# Altium PCB G38TPS40200CC.PcbDoc
Units mil, origin at the board's own origin, x right, y up, seen from the top; angles counter-clockwise.
Board outline 5970.62 x 4317.08 mil, 2 copper layers (Top Layer, Bottom Layer); 99 components, 51 nets, 225 pads, 8 vias.
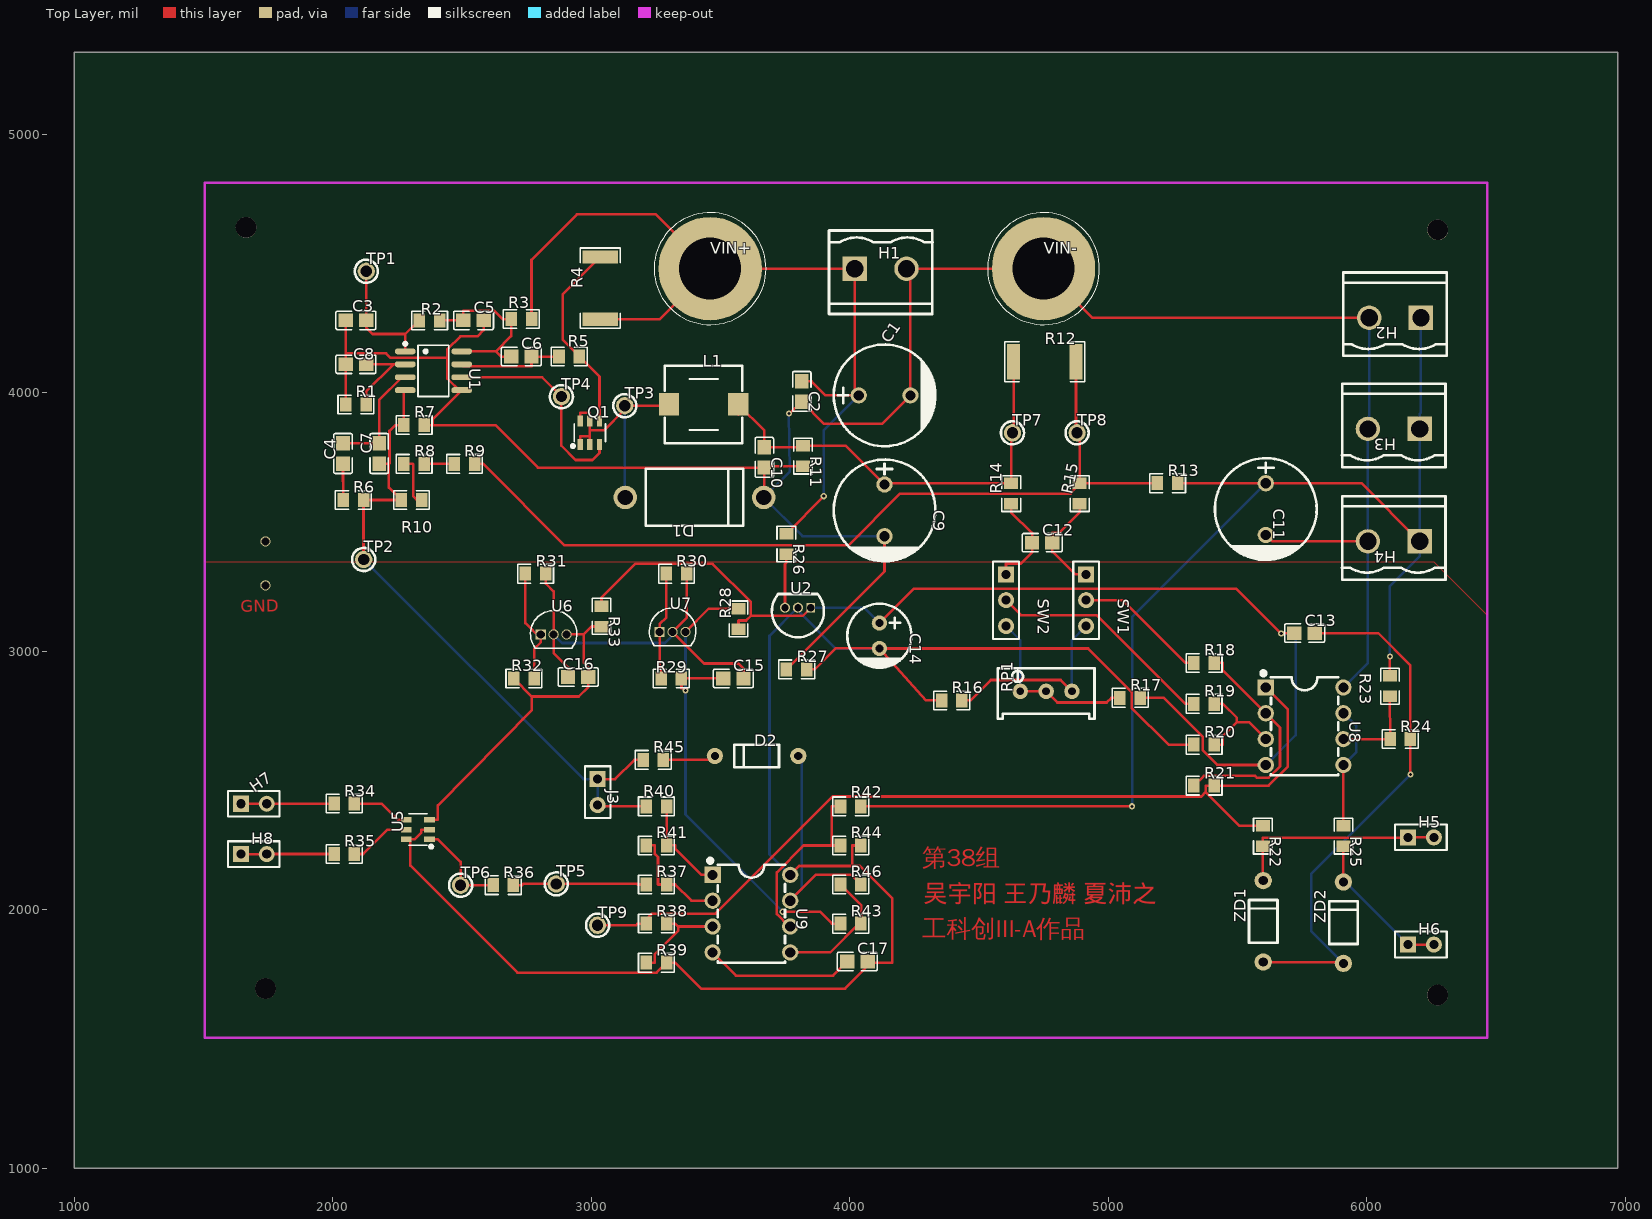
[diagram p0: Top Layer view]
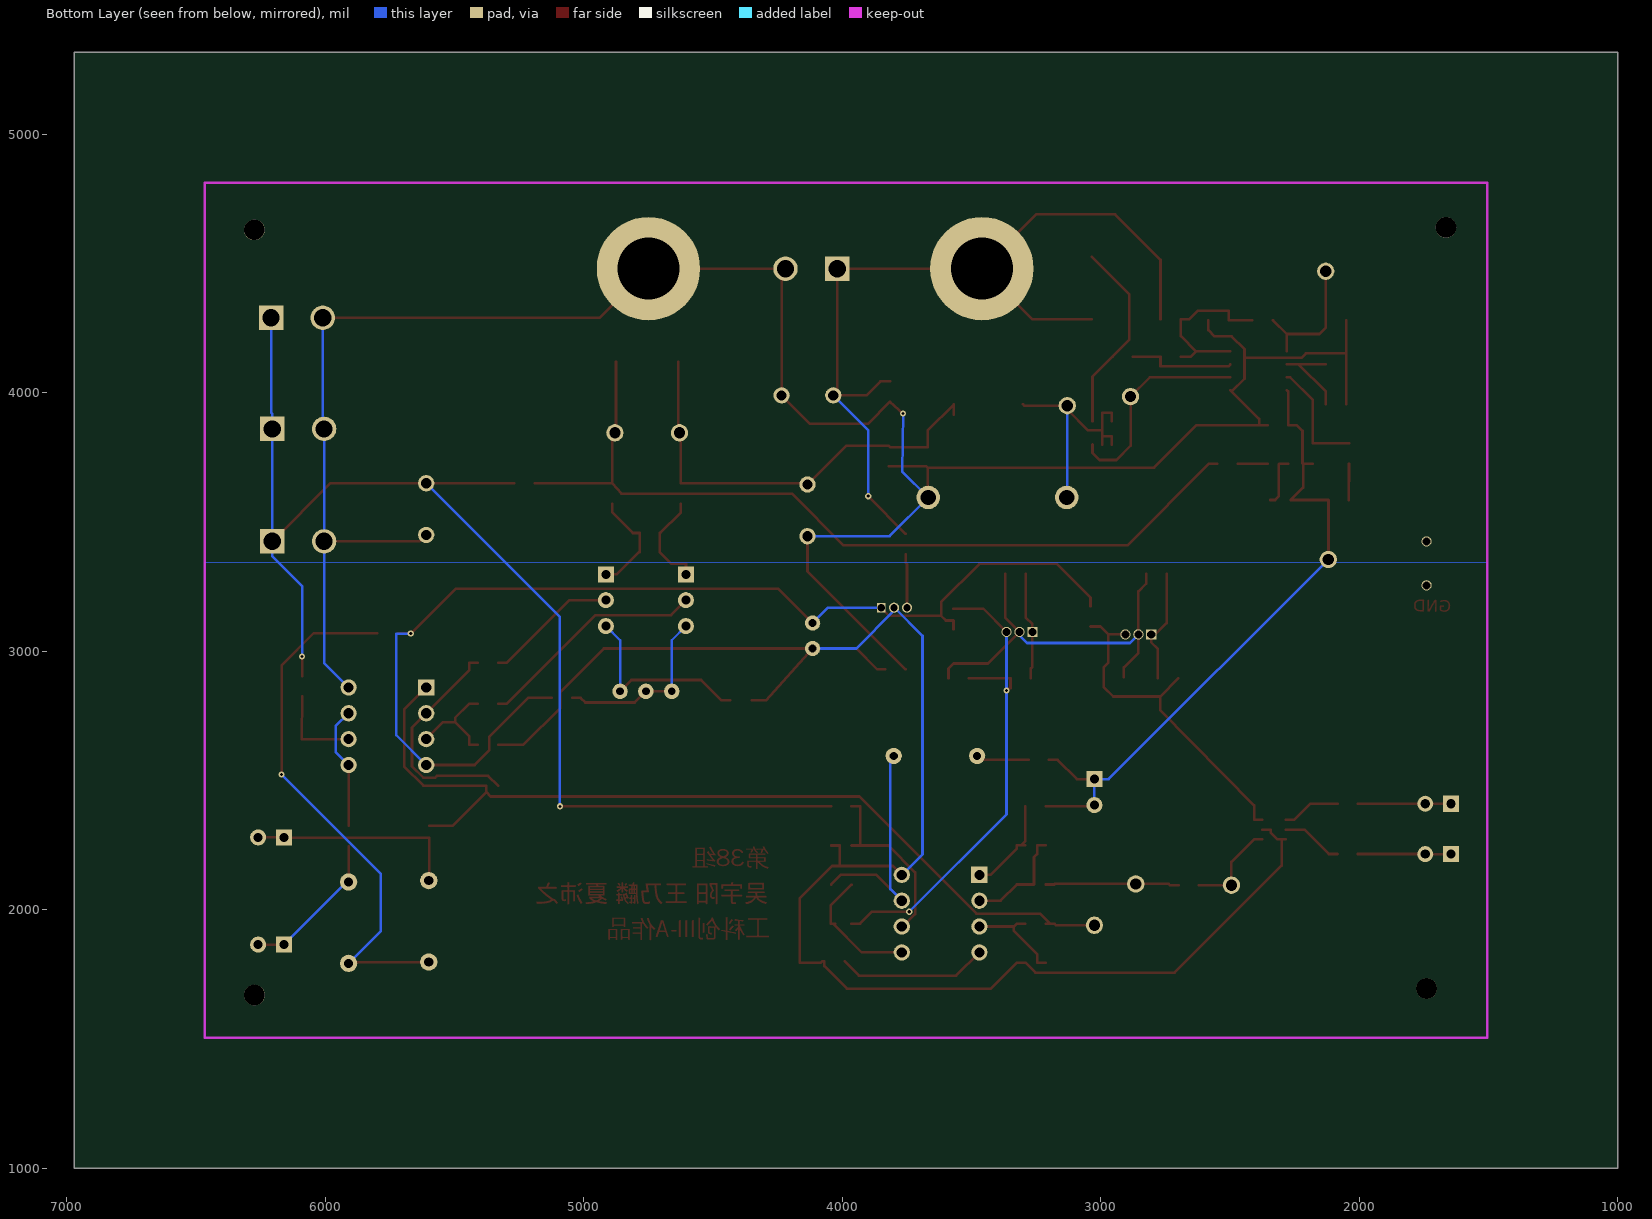
[diagram p1: Bottom Layer view, seen from below]

## Layer stack, top to bottom
Top Layer: signal copper (thickness not stored)
Dielectric: dielectric 12.6, FR-4, Dk 4.8
Bottom Layer: signal copper (thickness not stored)

## Board outline
6970.62,1000 1000,1000 1000,5317.08 6970.62,5317.08

## Components (designator, comment, footprint, x,y, rotation, side; value= is the part's Value field where it differs from the comment)
C1 "470u/35V" 470UF/50V 4134.41,3990.08 r0 top
C2 "0.1u" C0805 3814.41,4005.08 r270 top
C3 "470p" C0805 2089.41,4280.08 r180 top
C4 "1500p" C0805 2039.41,3765.08 r270 top
C5 "0.1u" C0805 2544.41,4280.08 r0 top
C6 "200p" C0805 2729.41,4140.08 r0 top
C7 "1u" C0805 2179.41,3765.08 r90 top
C8 "3.3u" C0805 2089.41,4110.08 r0 top
C9 "470u/35V" 470UF/50V 4134.41,3545.08 r270 top
C10 "0.1u" C0805 3669.41,3750.08 r270 top
C11 "470u/35V" 470UF/50V 5609.41,3550.08 r270 top
C12 "0.1u" C0805 4744.41,3420.08 r0 top
C13 "0.1u" C0805 5759.41,3070.08 r0 top
C14 "33u" 33UF/50V 4114.41,3060.08 r270 top
C15 "0.1u" C0805 3549.41,2895.08 r0 top
C16 "0.1u" C0805 2949.41,2900.08 r180 top
C17 "0.1u" C0805 4029.41,1800.08 r0 top
D1 "1N5822_C845404" DO-27_BD5.3-L8.4-P12.40-D1.3-RD 3399.41,3595.08 r180 top
D2 "1N4148" DO-35_BD2.0-L4.2-P8.20-D0.5-RD 3639.41,2595.08 r0 top
H1 "HDR-F-2.54_1x2" CONN-TH_P5.08_2EDGV-5.08-02P-14-100A-H 4119.41,4480.08 r0 top
H2 "HDR-F-2.54_1x2" CONN-TH_P5.08_2EDGV-5.08-02P-14-100A-H 6109.41,4290.08 r180 top
H3 "HDR-F-2.54_1x2" CONN-TH_P5.08_2EDGV-5.08-02P-14-100A-H 6104.41,3860.08 r180 top
H4 "HDR-F-2.54_1x2" CONN-TH_P5.08_2EDGV-5.08-02P-14-100A-H 6104.41,3425.08 r180 top
H5 "HDR-F-2.54_1x2" HDR-F-2.54_1X2 6209.41,2280.08 r0 top
H6 "HDR-F-2.54_1x2" HDR-F-2.54_1X2 6209.41,1865.08 r0 top
H7 "HDR-F-2.54_1x2" HDR-F-2.54_1X2 1694.41,2410.08 r0 top
H8 "HDR-F-2.54_1x2" HDR-F-2.54_1X2 1694.41,2215.08 r0 top
J3 "HDR-F-2.54_1x2" HDR-F-2.54_1X2 3024.41,2455.08 r270 top
L1 "33uH" IND-SMD_L7.0-W7.0_SMDRI74-330MT 3434.41,3955.08 r0 top
Q1 "TPFDC654P" SOT-23-6_L2.9-W1.6-P0.95-LS2.8-BL 2994.41,3845.08 r0 top
R1 "1M" R0805 2089.41,3955.08 r0 top
R2 "68k" R0805 2374.41,4280.08 r180 top
R3 "10" R0805 2729.41,4285.08 r180 top
R4 "0.05" R2512 3034.41,4405.08 r90 top
R5 "2k" R0805 2914.41,4140.08 r180 top
R6 "300k" R0805 2079.41,3585.08 r0 top
R7 "16k" R0805 2314.41,3875.08 r0 top
R8 "100k" R0805 2314.41,3725.08 r0 top
R9 "51" R0805 2509.41,3725.08 r0 top
R10 "100" R0805 2304.41,3585.08 r0 top
R11 "2k" R0805 3819.41,3755.08 r270 top
R12 "0.10/0.5W" R2512 4754.41,4120.08 r0 top
R13 "0" R0805 5229.41,3650.08 r0 top
R14 "10" R0805 4624.41,3610.08 r270 top
R15 "10" R0805 4889.41,3610.08 r90 top
R16 "5.1k" R0805 4394.41,2810.08 r0 top
R17 "5.1K" R0805 5084.41,2820.08 r0 top
R18 "10k" R0805 5370.66,2955.08 r0 top
R19 "10k" R0805 5370.66,2796.75 r0 top
R20 "100k" R0805 5370.66,2638.41 r0 top
R21 "100k" R0805 5370.66,2480.08 r0 top
R22 "10" R0805 5597.84,2285.08 r270 top
R23 "1k" R0805 6089.41,2865.08 r270 top
R24 "1k" R0805 6129.41,2660.08 r0 top
R25 "10" R0805 5909.41,2285.08 r270 top
R26 "0" R0805 3754.41,3415.08 r270 top
R27 "0" R0805 3794.41,2930.08 r0 top
R28 "510" R0805 3569.41,3125.08 r90 top
R29 "2.2k" R0805 3309.41,2895.08 r180 top
R30 "6.8k" R0805 3329.41,3300.08 r0 top
R31 "1k" R0805 2784.41,3300.08 r0 top
R32 "1k" R0805 2739.41,2895.08 r0 top
R33 "1k" R0805 3039.41,3135.08 r270 top
R34 "10" R0805 2044.41,2410.58 r0 top
R35 "10" R0805 2044.41,2215.58 r0 top
R36 "0" R0805 2659.41,2095.08 r0 top
R37 "10k" R0805 3251.91,2097.58 r0 top
R38 "10k" R0805 3251.91,1946.33 r0 top
R39 "100k" R0805 3251.91,1795.08 r0 top
R40 "51k" R0805 3251.91,2400.08 r180 top
R41 "100k" R0805 3251.91,2248.83 r0 top
R42 "10k" R0805 4003.39,2400.08 r180 top
R43 "10k" R0805 4003.39,1945.93 r0 top
R44 "100k" R0805 4003.39,2248.7 r0 top
R45 "100k" R0805 3239.41,2580.08 r0 top
R46 "100k" R0805 4003.39,2097.32 r0 top
RP1 "1k" RES-ADJ-TH_3P-L9.7-W5.0-P2.54 4759.41,2845.08 r90 top
SW1 "CS12ANW03" HDR-M-2.54_1X3 4914.41,3197.58 r270 top
SW2 "CS12ANW03" HDR-M-2.54_1X3 4604.41,3197.58 r270 top
TP1 "1625854-2" TESTPOINT-TH_Z2-1.5-8-2.5 2129.41,4470.08 r0 top
TP2 "1625854-2" TESTPOINT-TH_Z2-1.5-8-2.5 2119.41,3355.08 r0 top
TP3 "1625854-2" TESTPOINT-TH_Z2-1.5-8-2.5 3129.41,3950.08 r0 top
TP4 "1625854-2" TESTPOINT-TH_Z2-1.5-8-2.5 2884.41,3985.08 r0 top
TP5 "1625854-2" TESTPOINT-TH_Z2-1.5-8-2.5 2864.41,2100.08 r0 top
TP6 "1625854-2" TESTPOINT-TH_Z2-1.5-8-2.5 2494.41,2095.08 r0 top
TP7 "1625854-2" TESTPOINT-TH_Z2-1.5-8-2.5 4629.41,3845.08 r0 top
TP8 "1625854-2" TESTPOINT-TH_Z2-1.5-8-2.5 4879.41,3845.08 r0 top
TP9 "1625854-2" TESTPOINT-TH_Z2-1.5-8-2.5 3024.41,1940.08 r0 top
U1 "TPS40200D" SOIC-8_L4.9-W3.9-P1.27-LS6.0-BL 2389.41,4085.08 r270 top
U2 "78L07" TO-92 3799.41,3155.08 r180 top
U5 "DAC6571IDBVT" SOT-23-6_L2.9-W1.6-P0.95-LS2.8-BL 2329.41,2310.08 r90 top
U6 "TL431L-1%" TO-92-3_L4.6-W3.6-P1.27-L 2854.41,3065.08 r0 top
U7 "TL431L-1%" TO-92-3_L4.6-W3.6-P1.27-L 3314.41,3075.08 r0 top
U8 "TLV2372IP" PDIP-8_L9.6-W6.4-P2.54-LS7.9-BL 5759.41,2710.08 r270 top
U9 "TLV2372IP" PDIP-8_L9.6-W6.4-P2.54-LS7.9-BL 3619.41,1985.08 r270 top
VIN+ "5012" BANANA_JACK_1PIN 3459.41,4480.08 r0 top
VIN- "5012" BANANA_JACK_1PIN 4749.41,4480.08 r0 top
ZD1 "3.3V" DO-41_BD2.8-L4.2-P8.00-D0.7-FD 5599.41,1955.08 r90 top
ZD2 "3.3V" DO-41_BD2.8-L4.2-P8.00-D0.7-FD 5909.41,1950.08 r90 top

## Footprints (in the part's own frame and the unit in brackets; to place one, negate y for a bottom-side part, rotate by r counter-clockwise, add the part's x,y. Pads: shape width x height; smd on the part's side, far side on the other; paste and mask are expansions set on the pad)
33UF/50V [mm]
  round 1.5 hole 0.8: 1(-1.25,0) 2(1.25,0)
  silkscreen extent -3.15,-3.15 3.17,3.15
470UF/50V [mm]
  round 1.6 hole 1: +(-2.54,0) -(2.54,0)
  silkscreen extent -4.99,-5 5.08,5
BANANA_JACK_1PIN [mil]
  round 400 hole 240.16: 1(0,0)
  silkscreen extent -216,-216 217,217
C0805 [mm]
  rect 1.41x1.35 smd: 1(-1,0) 2(1,0)
  silkscreen extent -1.96,-0.9 1.96,0.9
CONN-TH_P5.08_2EDGV-5.08-02P-14-100A-H [mm]
  rect 2.4x2.4 hole 1.7: 1(-2.54,0)
  round 2.4 hole 1.7: 2(2.54,0)
  silkscreen extent -5.08,-4.45 5.1,3.75
DO-27_BD5.3-L8.4-P12.40-D1.3-RD [mm]
  round 2.3 hole 1.5: 1(6.8,0) 2(-6.8,0)
  silkscreen extent -4.8,-2.8 4.8,2.8
DO-35_BD2.0-L4.2-P8.20-D0.5-RD [mm]
  round 1.6 hole 0.8: 1(-4.1,0) 2(4.1,0)
  silkscreen extent -2.2,-1.1 2.2,1.1
DO-41_BD2.8-L4.2-P8.00-D0.7-FD [mm]
  round 1.7 hole 0.9: 1(-4,0) 2(4,0)
  silkscreen extent -2.1,-1.4 2.1,1.4
HDR-F-2.54_1X2 [mil]
  rect 62x62 hole 35: 1(-50,0)
  round 62 hole 35: 2(50,0)
  silkscreen extent -100,-49 100,50
HDR-M-2.54_1X3 [mil]
  rect 62x62 hole 35: 1(-100,0)
  round 62 hole 35: 2(0,0) 3(100,0)
  silkscreen extent -150,-50 150,50
IND-SMD_L7.0-W7.0_SMDRI74-330MT [mm]
  rect 2x2.2 smd: 1(-3.4,0) 2(3.4,0)
  silkscreen extent -3.8,-3.8 3.8,3.8
PDIP-8_L9.6-W6.4-P2.54-LS7.9-BL [mil]
  rect 63x63 hole 39.37: 1(-150,-150)
  round 63 hole 39.37: 2(-50,-150) 3(50,-150) 4(150,-150) 5(150,150) 6(50,150) 7(-50,150) 8(-150,150)
  silkscreen extent -213,-167 190,130
R0805 [mil]
  rect 44.59x54.21 smd: 1(-39.37,0) 2(39.37,0)
  silkscreen extent -69,-36 69,36
R2512 [mil]
  rect 50.49x136.06 smd: 1(-120.72,0) 2(120.72,0)
  silkscreen extent -155,-77 155,77
RES-ADJ-TH_3P-L9.7-W5.0-P2.54 [mil]
  round 60 hole 30: 1(0,100) 2(0,0) 3(0,-100)
  silkscreen extent -106,-187 89,187
SOIC-8_L4.9-W3.9-P1.27-LS6.0-BL [mm]
  oval 0.588x2.045 smd: 1(-1.905,-2.773) 2(-0.635,-2.773) 3(0.635,-2.773) 4(1.905,-2.773) 5(1.905,2.773) 6(0.635,2.773) 7(-0.635,2.773) 8(-1.905,2.773)
  silkscreen extent -2.8,-2.92 2.53,1.52
SOT-23-6_L2.9-W1.6-P0.95-LS2.8-BL [mm]
  rect 0.532x1.072 smd: 1(-0.95,-1.149) 2(0,-1.149) 3(0.95,-1.149) 4(0.95,1.149) 5(0,1.149) 6(-0.95,1.149)
  silkscreen extent -1.82,-1.45 1.54,0.89
TESTPOINT-TH_Z2-1.5-8-2.5 [mm]
  round 1.7 hole 1.1: 1(0,0)
  silkscreen extent -1.13,-1.13 1.14,1.13
TO-92 [mil]
  rect 32x38 hole 28: 1(-49.8,-13.36)
  round 39 hole 28: 2(0.2,-13.36) 3(50.2,-13.36)
  silkscreen extent -101,-66 101,101
TO-92-3_L4.6-W3.6-P1.27-L [mm]
  rect 1x1 hole 0.8: 1(-1.27,0)
  round 1 hole 0.8: 2(0,0) 3(1.27,0)
  silkscreen extent -2.28,-1.35 2.28,2.34

## Free pads (board coordinates)
  round 39.37 hole 31.5: 5(1739.41,3425.08) 6(1739.41,3255.08)
  round 80 hole 80 unplated: ""(1664.41,4640.08) ""(1739.41,1695.08) ""(6274.41,1670.08) ""(6274.41,4630.08)

## Via types
v1: diameter 24, hole 12, Top Layer to Bottom Layer, tented both sides, 8 vias

## Nets (pads, with @x,y where several pads share a name; then routed paths per layer and width w, separated by ;. In a path a pad name is that pad's centre, name@x,y a point inside that pad or via, vN(x,y) a via of type N, cw(c..) or ccw(c..) an arc to the next point about the centre after c; other vN are vias at no path point)
+3.3VREF: C16.1 R32.1 R33.2 U5.3 U6.3 | length 1349.5
  Top Layer w10: U5.3@2374.65,2347.48 2406.76,2347.48 ; 2406.71,2347.48 2406.71,2403.78 2769.81,2773.18 2769.41,2825.08 ; R32.1 2769.41,2825.08 ; U6.3 2970.66,3065.08 ; R33.2 3001.29,3095.71 2970.66,3065.08 ; 2769.41,2825.08 2951.41,2825.08 2988.81,2862.48 C16.1 2988.78,2937.67 2970.66,2955.79 2970.66,3065.08
+5VREF: C15.1 R28.2 R29.1 R43.1 U7.3 | length 1941.8
  Top Layer w10: v1(3364.41,2848.21) 3355.66,2856.96 3348.78,2856.96 R29.1 C15.1 ; U7.3 3453.78,3164.45 R28.2@3569.41,3164.45 ; v1(3740.59,1992.41) 3884.23,1992.41 3930.71,1945.93 R43.1
  Bottom Layer w10: U7.3 v1(3364.41,2848.21) 3364.41,2368.59 v1(3740.59,1992.41)
+7V: C13.1 C14.1 R17.2 R28.1 R33.1 U2.1 U8.4 | length 4371.8
  Top Layer w10: R33.1@3039.41,3174.45 3039.41,3207.76 3169.9,3338.25 3469.58,3338.25 3617.09,3190.74 3617.09,3137.42 ; R28.1 3569.41,3119.01 3598.68,3119.01 3617.09,3137.42 ; U2.1 3818.19,3137.42 3617.09,3137.42 ; C14.1 4247.77,3242.65 5494.55,3242.65 v1(5668.97,3068.23) 5679.42,3068.23 5681.27,3070.08 C13.1 ; R17.2 5214.65,2820.08 5364.64,2670.09 5364.64,2617.7 5422.26,2560.08 U8.4
  Bottom Layer w10: U2.1 4055.26,3168.44 C14.1 ; U8.4 5724.41,2675.08 5724.41,3068.18 v1(5668.97,3068.23)
C17_1: C17.1 U9.4 | length 580.7
  Top Layer w10: U9.4 3559.41,1745.08 3935.04,1745.08 C17.1
GND: C1.- C2.2 C3.2 C5.2 C8.1 C9.- C10.2 C11.- D1.2 H1.2 H2.2 H3.2 H4.2 pad.5 R1.1 R7.2 R11.2 R27.1 U1.5 U8.8 VIN-.1 | length 9330.6
  Top Layer w10: R1.1 C8.1 2050.04,4152.67 ; C3.2 2050.04,4152.67 ; R7.2 2387.09,3875.08 ; U1.5 U1.5@2493.22,4004.74 ; C5.2 2583.78,4242.5 2559.54,4218.26 2493.14,4218.26 2443.73,4168.85 2443.73,4135.09 ; D1.2 3669.41,3597.36 C10.2 ; R27.1 4134.41,3309.45 C9.- ; v1(3764.41,3920.08) C2.2@3814.41,3965.08 ; C2.2 3900.01,3880.08 4124.41,3880.08 C1.- 4234.41,4465.08 H1.2 VIN-.1 4939.41,4290.08 H2.2 ; R11.2 3674.41,3715.71 C10.2 ; C11.- 5634.41,3425.08 H4.2 ; 2050.04,4152.67 2054.99,4152.67 2055.04,4152.72 2205.85,4152.72 2223.48,4135.09 2443.73,4135.09 ; 2387.09,3875.08 2629.12,3875.08 2793.49,3710.71 C10.2 ; 2387.09,3875.08 2387.09,3898.61 U1.5@2493.22,4004.74 ; 2443.73,4135.09 2443.73,4054.23 U1.5@2493.22,4004.74
  Bottom Layer w10: v1(3764.41,3920.08) 3768.03,3695.98 D1.2 3817.13,3445.08 C9.- ; U8.8 6004.41,2955.08 H4.2 H3.2 6009.41,3865.08 H2.2
GND1: C13.2 C14.2 C15.2 C16.2 C17.2 pad.6 R16.1 R20.1 R24.2 R27.2 R30.2 R31.2 R39.2 R44.2 U2.2 U5.2 U5.6 U6.2 U7.2 U9.8 ZD1.1 ZD2.1 | length 10381.2
  Top Layer w10: U5.6 U5.6@2300.23,2272.68 ; U5.2@2374.65,2310.08 2342.54,2310.08 2342.54,2298.94 2316.28,2272.68 U5.6@2300.23,2272.68 ; R31.2 2823.78,3261.96 2854.41,3231.33 U6.2 2854.41,2993.3 2910.04,2937.67 C16.2 ; R30.2 3368.78,3129.45 U7.2 3436.87,2952.62 3568.83,2952.62 3588.78,2932.67 C15.2 ; U9.8 3803.68,2169.35 4009.46,2169.35 4009.46,2248.7 R44.2 ; R27.2 3864.41,2930.08 3945.21,3010.88 C14.2 ; 4009.41,2169.38 4038.81,2169.38 4164.41,2043.78 4164.41,1795.08 C17.2@4082.51,1795.08 ; C17.2@4082.55,1795.08 4077.55,1800.08 C17.2 4068.78,1782.5 4043.78,1757.5 3981.41,1695.08 3424.61,1695.08 3324.61,1795.08 R39.2 3253.11,1756.91 2714.42,1756.91 2300.23,2171.1 U5.6@2300.23,2272.68 ; R16.1@4349.41,2810.08 4294.41,2810.08 C14.2 4922.06,3010.87 5090.43,2842.5 5090.43,2781.17 5233.19,2638.41 R20.1 ; ZD1.1 5904.41,1797.6 ZD2.1 ; C13.2 6044.41,3070.08 6168.78,2945.71 R24.2 v1(6168.78,2523.19)
  Bottom Layer w10: U6.2 2887.36,3032.13 3284.69,3032.13 3314.41,3061.85 U7.2 ; U9.8@3768.81,2135.08 3689.41,2214.48 3689.41,3059.28 U2.2@3798.61,3168.48 ; U2.2 3799.21,3156.95 3945.29,3010.87 C14.2 ; ZD2.1 5784.41,1917.6 5784.41,2138.82 v1(6168.78,2523.19)
H7_1: H7.1 H7.2 R34.1 | length 360.8
  Top Layer w10: H7.1 H7.2 1971.23,2410.08 1971.73,2410.58 R34.1
H8_1: H8.1 H8.2 R35.1 | length 360.8
  Top Layer w10: H8.1 1686.42,2215.08 H8.2 1744.91,2215.58 R35.1
ISEN: R21.2 R22.1 R38.1 TP9.1 U8.1 | length 3571.7
  Top Layer w10: TP9.1 3172.98,1940.08 3179.23,1946.33 R38.1@3195.89,1946.33 ; R38.1 R38.1@3195.89,1946.33 ; R21.2 5619.81,2480.08 5694.41,2554.68 5694.41,2775.08 U8.1 ; R21.2 5393.38,2480.08 5376.73,2480.08 5376.73,2455.11 ; R22.1@5597.84,2324.45 5507.39,2324.45 5376.73,2455.11 ; R38.1@3195.89,1946.33 3234.64,1985.08 3480.34,1985.08 3933.51,2438.25 5359.87,2438.25 5376.73,2455.11
L1_2: C9.+ C10.1 L1.2 R11.1 R12.1 R14.1 TP7.1 | length 1742.1
  Top Layer w10: L1.2@3568.27,3915.76 L1.2 3669.41,3853.94 3669.41,3789.45 3814.41,3789.45 3819.41,3794.45 3985.04,3794.45 C9.+ 4138.78,3649.45 4624.41,3649.45 4624.41,3840.08 TP7.1 4633.69,3849.36 R12.1
Q1_4: Q1.4 R4.2 R5.1 | length 761.7
  Top Layer w10: R5.1@2959.14,4135.08 2954.14,4140.08 R5.1 ; Q1.4 3031.81,4062.08 R5.1 ; R4.2 2889.41,4380.78 2889.41,4205.28 R5.1
Q1_6: D1.1 L1.1 Q1.1 Q1.2 Q1.5 Q1.6 TP3.1 | length 974.2
  Top Layer w10: Q1.1 2957.01,3831.95 2994.41,3831.95 ; Q1.6 2957.01,3922.43 2994.41,3922.43 2994.41,3906.38 Q1.5 2994.41,3854.23 ; Q1.2 2994.41,3831.95 ; L1.1@3300.55,3955.08 3295.55,3950.08 TP3.1 3129.41,3935.13 3048.51,3854.23 2994.41,3854.23 ; 2994.41,3831.95 2994.41,3854.23
  Bottom Layer w10: TP3.1 3129.41,3597.36 D1.1
R2_1: C5.1 C6.1 R2.1 R3.2 U1.8 | length 676.5
  Top Layer w10: R2.1 2466.27,4280.08 C5.1 2505.04,4317.67 2505.09,4317.72 2624.09,4317.72 2656.73,4285.08 R3.2 2690.04,4218.85 2631.27,4160.08 ; U1.8 2631.27,4160.08 ; C6.1 2651.27,4140.08 2631.27,4160.08
R2_2: C3.1 R2.2 TP1.1 U1.1 | length 523.7
  Top Layer w10: TP1.1 2128.78,4469.45 C3.1 2128.78,4252.5 2133.78,4247.5 2153.81,4227.47 2280.26,4227.47 ; U1.1 2280.26,4227.47 ; R2.2 2332.87,4280.08 2280.26,4227.47
R6_1: C4.2 R6.1 | length 140.6
  Top Layer w10: C4.2 R6.1
R9_1: R8.2 R9.1 | length 116.3
  Top Layer w10: R8.2 R9.1
R10_1: C7.1 J3.1 J3.2 R6.2 R7.1 R10.1 R40.2 R45.1 TP2.1 U1.4 | length 2658.7
  Top Layer w10: TP2.1 2118.78,3355.71 R6.2 R10.1 2217,3633.12 2217,3725.71 ; C7.1 2217,3725.71 ; U1.4 2275.04,4004.86 R7.1 2241.73,3875.08 2219.34,3852.69 2219.34,3728.05 2217,3725.71 ; J3.2 3029.41,2400.08 R40.2 ; J3.1 3091.73,2505.08 3166.73,2580.08 R45.1
  Bottom Layer w10: TP2.1 2969.41,2505.08 J3.1 J3.2
R10_2: R8.1 R10.2 | length 198.7
  Top Layer w10: R8.1 2308.34,3725.08 2310.48,3722.94 2310.48,3600.08 2325.48,3585.08 R10.2
R14_2: C12.1 R14.2 SW2.1 | length 382.5
  Top Layer w10: SW2.1 4604.41,3339.59 4662.13,3339.59 4705.04,3382.5 C12.1 4705.04,3457.67 4704.14,3457.67 4624.41,3537.4 R14.2
R15_1: C12.2 R15.1 SW1.1 | length 412.9
  Top Layer w10: R15.1 4889.41,3537.4 4809.68,3457.67 4783.78,3457.67 C12.2 4783.78,3382.5 4787.48,3382.5 4872.4,3297.58 SW1.1
R16_2: R16.2 RP1.3 SW1.3 | length 751.8
  Top Layer w10: R16.2 4467.09,2810.08 4545.98,2888.97 4815.52,2888.97 RP1.3
  Bottom Layer w10: RP1.3 4859.41,3042.58 SW1.3
R17_1: R17.1 RP1.1 RP1.2 SW2.3 | length 686.5
  Top Layer w10: RP1.1 RP1.2 4802.81,2801.69 4993.34,2801.69 5011.73,2820.08 R17.1
  Bottom Layer w10: SW2.3 4659.41,3042.58 RP1.1
R18_2: R18.2 R21.1 U8.2 | length 895.5
  Top Layer w10: R21.1 5369.41,2518.28 5567.51,2518.28 5575.01,2510.68 5620.21,2510.68 5664.41,2554.88 5664.41,2705.08 U8.2 5443.34,2926.15 5443.34,2955.08 R18.2
R19_2: R19.2 R20.2 U8.3 | length 408.9
  Top Layer w10: R20.2 5443.34,2638.41 5443.34,2671.72 5497.24,2725.62 ; R19.2@5410.03,2796.75 5443.34,2796.75 5497.24,2742.85 5497.24,2725.62 ; U8.3 5543.87,2725.62 5497.24,2725.62
R22_2: H5.1 H5.2 R22.2 ZD1.2 | length 829.1
  Top Layer w10: 5597.84,2279.01 R22.2 5597.84,2114.13 ZD1.2 ; 5597.89,2279.08 6158.41,2279.08 H5.1 H5.2
R23_2: R23.2 R24.1 U8.6 | length 346.2
  Top Layer w10: U8.6 R24.1 ; R23.2 R24.1
R25_1: R25.1 U8.5 U8.7 | length 477.1
  Top Layer w10: R25.1@5909.41,2324.45 U8.5
  Bottom Layer w10: U8.5 5959.41,2610.08 5959.41,2710.08 U8.7
R25_2: H6.1 H6.2 R25.2 ZD2.2 | length 634.9
  Top Layer w10: ZD2.2 R25.2 ; H6.1@6149.41,1860.08 6154.41,1865.08 H6.2
  Bottom Layer w10: ZD2.2 5916.93,2107.56 H6.1 ; H6.1 6159.41,1862.09 6149.41,1852.09 6149.41,1855.08 H6.1
R26_2: R26.2 U2.3 | length 209.4
  Top Layer w10: U2.3 3749.21,3337.2 3754.41,3342.4 R26.2
R29_2: R29.2 R30.1 U7.1 | length 417.9
  Top Layer w10: R29.2 3270.04,2933.2 3264.41,2938.83 U7.1 3264.41,3105.77 3290.04,3131.4 R30.1
R32_2: R31.1 R32.2 U6.1 | length 455.6
  Top Layer w10: R31.1 2745.04,3109.1 U6.1@2804.41,3049.73 ; R32.2 2778.78,3008.75 2804.41,3034.38 U6.1@2804.41,3049.73 ; U6.1 U6.1@2804.41,3049.73
R34_2: R34.2 U5.4 | length 226.5
  Top Layer w10: R34.2 2188.96,2410.58 2252.06,2347.48 U5.4
R35_2: R35.2 U5.5 | length 239.5
  Top Layer w10: R35.2 2117.09,2215.58 2211.59,2310.08 U5.5
R36_1: R36.1 TP6.1 U5.1 | length 371.6
  Top Layer w10: U5.1@2374.65,2272.68 2406.76,2272.68 2494.41,2185.03 TP6.1 2586.73,2095.08 R36.1
R37_1: R36.2 R37.1 TP5.1 | length 516.9
  Top Layer w10: R36.2 2732.09,2095.08 2737.09,2100.08 TP5.1 3176.73,2100.08 3179.23,2097.58 R37.1
R37_2: R37.2 R41.1 U9.2 | length 426.9
  Top Layer w10: R41.1 3245.84,2248.83 3245.84,2215.53 3257.98,2203.39 3257.98,2097.58 R37.2 3324.59,2097.58 3387.09,2035.08 U9.2
R38_2: R38.2 R39.1 U9.3 | length 393.4
  Top Layer w10: R39.1 3245.84,1795.08 3245.84,1828.38 3335.84,1918.38 3335.84,1935.08 ; R38.2 3324.59,1946.33 3335.84,1935.08 ; U9.3 3335.84,1935.08
R40_1: R40.1 R41.2 U9.1 | length 390.1
  Top Layer w10: R41.2 R41.2@3307.94,2248.83 ; R40.1 3291.28,2265.49 R41.2@3307.94,2248.83 ; U9.1 3426.9,2135.08 3324.59,2237.39 3324.59,2248.83 R41.2@3307.94,2248.83
R42_2: R42.2 R44.1 U9.6 | length 707.7
  Top Layer w10: U9.6 3765.32,1935.08 3717.54,1982.86 3717.54,2144.67 3821.57,2248.7 3930.71,2248.7 ; R44.1 3930.71,2248.7 ; R42.2 3930.71,2400.08 3930.71,2248.7
R43_2: R43.2 R46.1 U9.5 | length 522
  Top Layer w10: U9.5 3924.41,1835.08 4035.26,1945.93 R43.2 ; R46.1 4044.41,2016.78 4044.41,1946.08 R43.2 ; R43.2@4026.11,1945.93 R43.2
R45_2: D2.1 R45.2 | length 205.4
  Top Layer w10: R45.2 3462.99,2580.08 D2.1
R46_2: D2.2 R46.2 U9.7 | length 914.5
  Top Layer w10: U9.7 3869.82,2135.49 4004.59,2135.49 R46.2
  Bottom Layer w10: U9.7 3813.84,2079.51 3813.84,2582.07 D2.2
SW1_2: R18.1 SW1.2 | length 517.3
  Top Layer w10: SW1.2 5055.48,3197.58 5297.98,2955.08 R18.1
SW2_2: R19.1 SW2.2 | length 892.9
  Top Layer w10: SW2.2 4662.35,3139.64 4955.09,3139.64 5297.98,2796.75 R19.1@5331.29,2796.75
U1_2: C8.2 R1.2 U1.2 | length 350
  Top Layer w10: R1.2 2128.78,4004.96 2233.9,4110.08 ; C8.2 2182.88,4110.08 U1.2
U1_3: C4.1 C7.2 U1.3 | length 445.2
  Top Layer w10: C4.1@2039.41,3804.45 2179.41,3804.45 2179.41,3972.5 2266.99,4060.08 U1.3
U1_6: Q1.3 TP4.1 U1.6 | length 820.6
  Top Layer w10: U1.6 2809.41,4060.08 TP4.1 2884.41,3795.08 2939.41,3740.08 3004.21,3740.08 3031.81,3767.68 ; 3031.81,3767.73 Q1.3
U1_7: C6.2 R5.2 U1.7 | length 417.2
  Top Layer w10: U1.7 2506.19,4102.45 2768.73,4102.45 2768.78,4102.5 C6.2 2807.55,4140.08 R5.2
VIN: C1.+ C2.1 H1.1 R3.1 R4.1 R26.1 VIN+.1 | length 3535.9
  Top Layer w10: R3.1 2768.78,4514.45 2944.41,4690.08 3249.41,4690.08 VIN+.1 ; R4.1 3263.69,4284.36 VIN+.1 ; R26.1 v1(3899.41,3600.08) ; C2.1@3814.41,4044.45 3852,4044.45 3906.37,3990.08 C1.+ 4019.41,4005.08 H1.1 VIN+.1
  Bottom Layer w10: v1(3899.41,3600.08) 3899.41,3855.08 C1.+
VOCV+: R9.2 R12.2 R13.1 R15.2 TP8.1 | length 3348.8
  Top Layer w10: R9.2 2582.09,3725.08 2897.11,3410.08 3994.41,3410.08 4194.41,3610.08 4854.41,3610.08 4889.41,3649.45 4889.41,3665.08 4889.41,3835.08 TP8.1 4875.13,3849.36 R12.2 ; R15.2@4889.41,3650.08 R13.1
VOUT+: C11.+ H2.1 H3.1 H4.1 R13.2 R23.1 R42.1 | length 4977.7
  Top Layer w10: R42.1 v1(5091.96,2400.08) ; R13.2 C11.+ 5979.41,3650.08 H4.1 ; R23.1@6089.41,2904.45 v1(6089.41,2980.08)
  Bottom Layer w10: v1(5091.96,2400.08) 5091.96,3132.63 C11.+ ; v1(6089.41,2980.08) 6089.41,3251.88 6204.41,3366.88 ; 6204.41,3366.83 H4.1 H3.1 6204.41,3918.33 6209.41,3923.33 H2.1

## Polygon pours and split planes (outlines as drawn)
GND1 on Bottom Layer (solid): 1505,1505 6465.62,1505 6465.62,3343.58 1505,3343.58
GND on Top Layer (solid): 1505,4812.08 6465.62,4812.08 6465.62,3138.86 6260.9,3343.58 1505,3343.58

## Other copper
Top Layer:
  text "GND" at 1644.41,3135.08 h80 r1
  text "第38组" at 4279.91,2145.08 h119.37
  text "吴宇阳 王乃麟 夏沛之" at 4283.91,2005.43 h119.37
  text "工科创III-A作品" at 4279.41,1870.08 h119.37